# EAGLE board dumbpad (EAGLE 9.6.1)
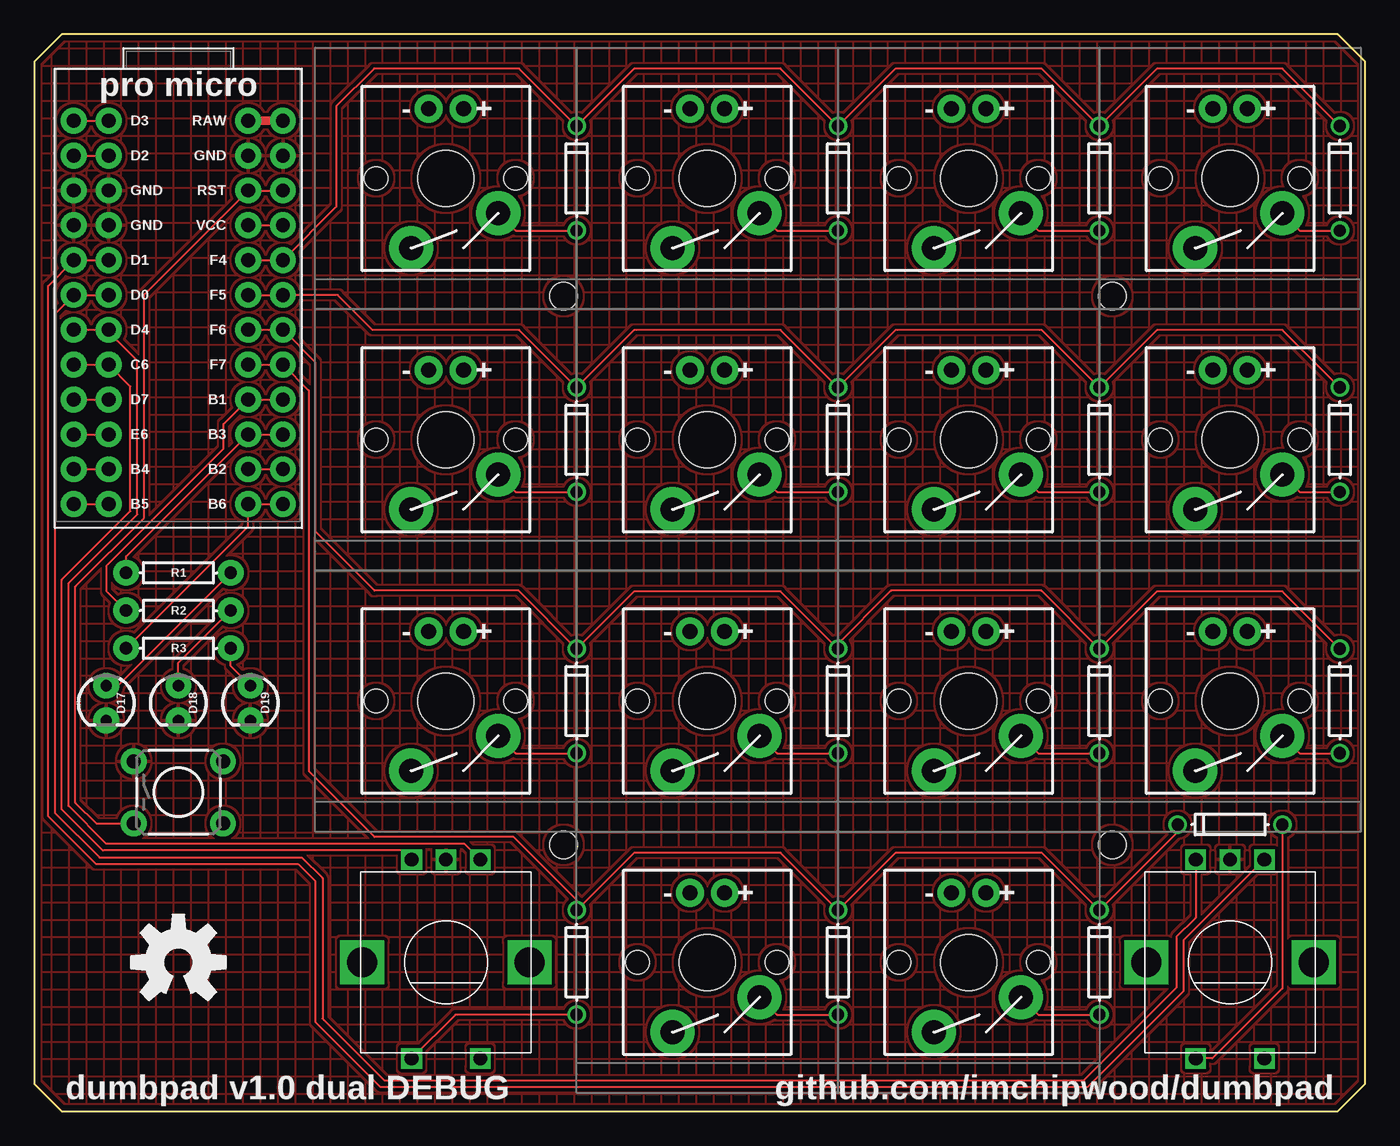
[diagram p0: board, top side]
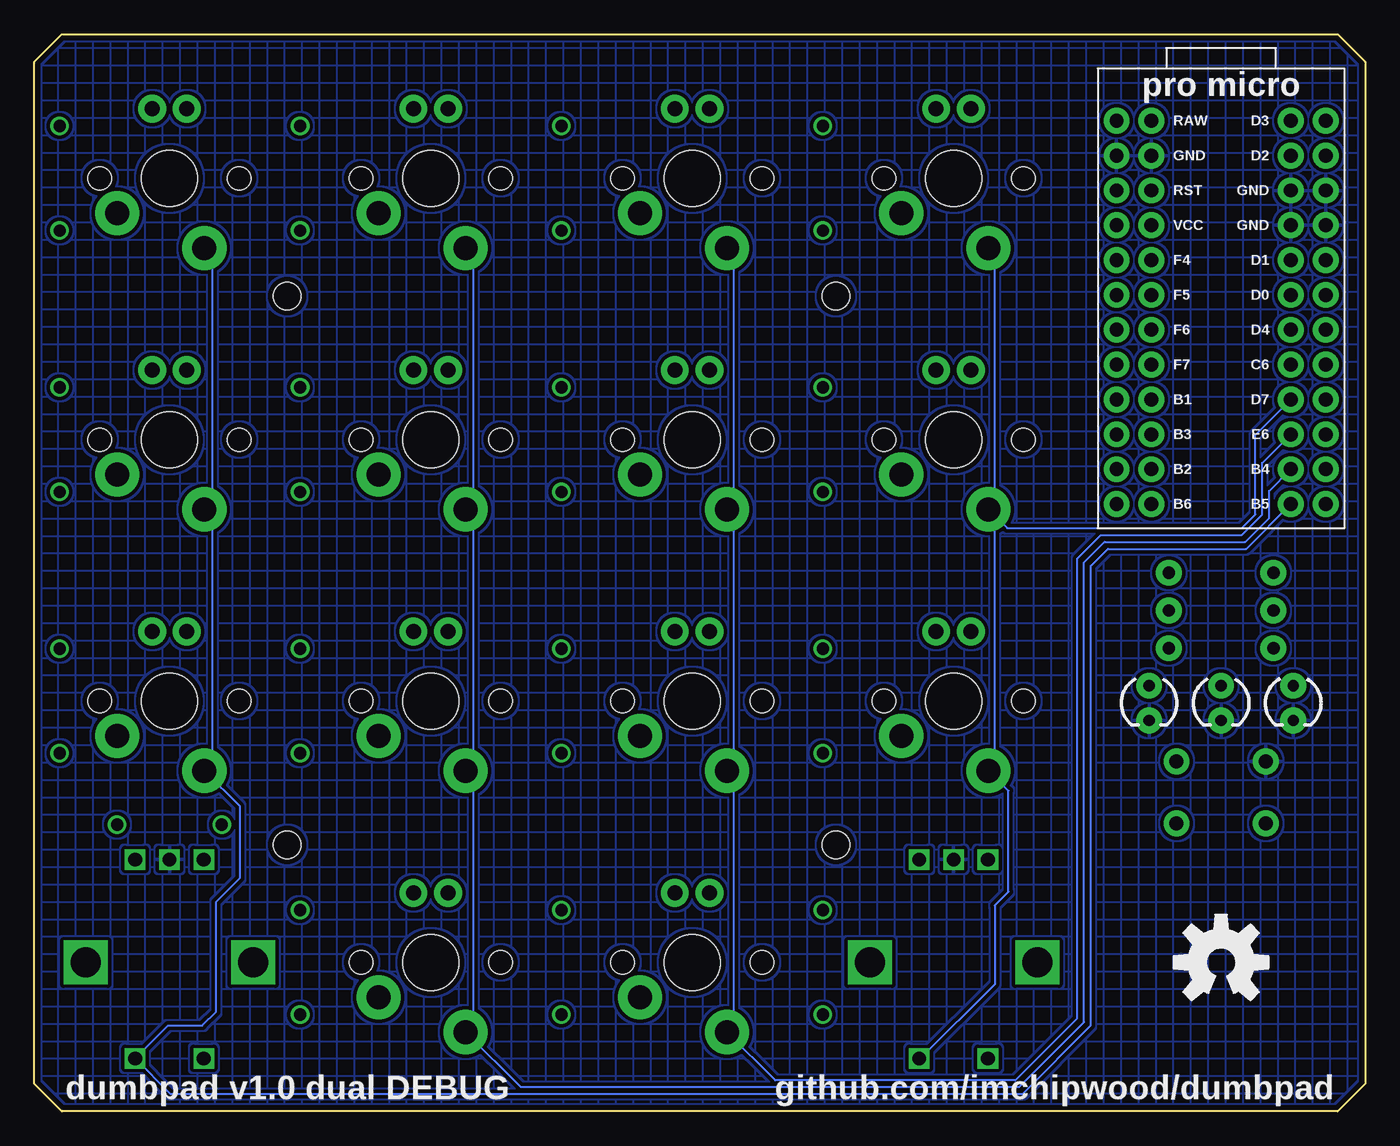
[diagram p1: board, bottom side, seen from below]

Size 97 x 78.5 mm. Coordinates in mm from the lower left corner, seen from the top.
Outline: 0,2 2,0 95,0 97,2 97,76.5 95,78.5 2,78.5 0,76.5 0,2
Copper layers (1*16): Top 0.035559375mm / dielectric 1.6mm / Bottom 0.035559375mm
Design rules "oshpark_2layer": minimum track width 6mil, minimum drill 10mil, track to track 6mil, track to pad 6mil, pad to pad 6mil, via to via 6mil, smd to smd 6mil, copper to edge 15mil, drill to drill 6mil, minimum pad ring 5mil, minimum via ring 5mil, stop-mask expansion 2.5mil, vias tented up to drill 0mil, thermal gap 10mil
Holes 2 mm at 38.58,19.43 78.58,19.43 38.58,59.42 78.58,59.42

## Footprints (pad centres in the part's own frame; a part is rotated, then mirrored left to right if it is on the bottom)
SPARKFUN_PRO_MICRO = drill 1.016 pad 1.88: 1 -7.62,12.7; 2 -7.62,10.16; 3 -7.62,7.62; 4 -7.62,5.08; 5 -7.62,2.54; 6 -7.62,0; 7 -7.62,-2.54; 8 -7.62,-5.08; 9 -7.62,-7.62; 10 -7.62,-10.16; 11 -7.62,-12.7; 12 -7.62,-15.24; 13 7.62,-15.24; 14 7.62,-12.7; 15 7.62,-10.16; 16 7.62,-7.62; 17 7.62,-5.08; 18 7.62,-2.54; 19 7.62,0; 20 7.62,2.54; 21 7.62,5.08; 22 7.62,7.62; 23 7.62,10.16; 24 7.62,12.7
DO-1N4148 = drill 0.9: A -3.81,0; C 3.81,0
LED_3MM = drill 0.813 pad 1.88: A -1.27,0; K 1.27,0
1X12_NO_SILK = drill 1.016 pad 1.88: 1 0,0; 2 2.54,0; 3 5.08,0; 4 7.62,0; 5 10.16,0; 6 12.7,0; 7 15.24,0; 8 17.78,0; 9 20.32,0; 10 22.86,0; 11 25.4,0; 12 27.94,0
AXIAL-0.3 = drill 0.9 pad 1.88: P$1 -3.81,0; P$2 3.81,0
ALPS_EC12E_SW = drill 1 square: A -2.5,-7.5; B 2.5,-7.5; C 0,-7.5; D -2.5,7; E 2.5,7 | drill 2.2 square: GND1 -6.1,0; GND2 6.1,0
CHERRY-MX-LED = drill 1.092 pad 2.032: A -1.27,-5.08; K 1.27,-5.08 | drill 1.753 pad 3.226: S1 -3.81,2.54; S2 2.54,5.08 | hole 4.089: 0,0 | hole 1.707: -5.08,0; 5.08,0
TACTILE_SWITCH_PTH_6.0MM = drill 1.016 pad 1.88: 1 -3.251,2.261; 2 3.251,2.261; 3 -3.251,-2.261; 4 3.251,-2.261

## Placement (x,y rotation side)
B1  SPARKFUN_PRO_MICRO  [SPARKFUN_PRO_MICRO]  10.5,59.5 0 top
D1  [DO-1N4148]  39.52,68 90 top
D2  [DO-1N4148]  58.58,68 90 top
D3  [DO-1N4148]  77.62,68 90 top
D4  [DO-1N4148]  95.15,68 90 top
D5  [DO-1N4148]  39.52,48.95 90 top
D6  [DO-1N4148]  58.58,48.95 90 top
D7  [DO-1N4148]  77.62,48.95 90 top
D8  [DO-1N4148]  95.15,48.95 90 top
D9  [DO-1N4148]  39.52,29.9 90 top
D10  [DO-1N4148]  58.58,29.9 90 top
D11  [DO-1N4148]  77.62,29.9 90 top
D12  [DO-1N4148]  95.15,29.9 90 top
D13  [DO-1N4148]  39.52,10.85 90 top
D14  [DO-1N4148]  58.58,10.85 90 top
D15  [DO-1N4148]  77.62,10.85 90 top
D16  [DO-1N4148]  87.15,20.9 180 top
D17  [LED_3MM]  5.25,29.75 270 top
D18  [LED_3MM]  10.5,29.75 270 top
D19  [LED_3MM]  15.75,29.75 270 top
JUMPER_LEFT  [1X12_NO_SILK]  5.42,44.26 90 top
JUMPER_RIGHT  [1X12_NO_SILK]  15.58,44.26 90 top
LOGO1  OSHW-LOGOL  [OSHW-LOGO-L]  10.5,10.85 0 bottom
LOGO2  OSHW-LOGOL  [OSHW-LOGO-L]  10.5,10.85 0 top
R1  330  [AXIAL-0.3]  10.5,39.25 180 top
R2  330  [AXIAL-0.3]  10.5,36.5 180 top
R3  330  [AXIAL-0.3]  10.5,33.75 180 top
RE0  EC12E_SW  [ALPS_EC12E_SW]  30,10.85 180 top
RE1  EC12E_SW  [ALPS_EC12E_SW]  87.15,10.85 180 top
S1  MOMENTARY-SWITCH-SPST-LED-PTH-CHERRY  [CHERRY-MX-LED]  30,68 180 top
S2  MOMENTARY-SWITCH-SPST-LED-PTH-CHERRY  [CHERRY-MX-LED]  49.05,68 180 top
S3  MOMENTARY-SWITCH-SPST-LED-PTH-CHERRY  [CHERRY-MX-LED]  68.1,68 180 top
S4  MOMENTARY-SWITCH-SPST-LED-PTH-CHERRY  [CHERRY-MX-LED]  87.15,68 180 top
S5  MOMENTARY-SWITCH-SPST-LED-PTH-CHERRY  [CHERRY-MX-LED]  30,48.95 180 top
S6  MOMENTARY-SWITCH-SPST-LED-PTH-CHERRY  [CHERRY-MX-LED]  49.05,48.95 180 top
S7  MOMENTARY-SWITCH-SPST-LED-PTH-CHERRY  [CHERRY-MX-LED]  68.1,48.95 180 top
S8  MOMENTARY-SWITCH-SPST-LED-PTH-CHERRY  [CHERRY-MX-LED]  87.15,48.95 180 top
S9  MOMENTARY-SWITCH-SPST-LED-PTH-CHERRY  [CHERRY-MX-LED]  30,29.9 180 top
S10  MOMENTARY-SWITCH-SPST-LED-PTH-CHERRY  [CHERRY-MX-LED]  49.05,29.9 180 top
S11  MOMENTARY-SWITCH-SPST-LED-PTH-CHERRY  [CHERRY-MX-LED]  68.1,29.9 180 top
S12  MOMENTARY-SWITCH-SPST-LED-PTH-CHERRY  [CHERRY-MX-LED]  87.15,29.9 180 top
S14  MOMENTARY-SWITCH-SPST-LED-PTH-CHERRY  [CHERRY-MX-LED]  49.05,10.85 180 top
S15  MOMENTARY-SWITCH-SPST-LED-PTH-CHERRY  [CHERRY-MX-LED]  68.1,10.85 180 top
S17  MOMENTARY-SWITCH-SPST-PTH-6.0MM  [TACTILE_SWITCH_PTH_6.0MM]  10.5,23.25 0 top

## Library data of the parts
B1 = SparkFun-Boards
D1-D16 = adafruit
D17-D19 = SparkFun-LED; PROD_ID: DIO-08794
JUMPER_LEFT JUMPER_RIGHT = SparkFun-Connectors
LOGO1 LOGO2 = SparkFun-Aesthetics
R1-R3 = SparkFun-Resistors; PROD_ID: RES-8371
RE0 RE1 = switch-alps; MPN: EC12E2424407; OC_FARNELL: 1520813; OC_NEWARK: 74M1068
S1-S12 S14 S15 = SparkFun-Switches; SF_ID: COM-13834
S17 = SparkFun-Switches; PROD_ID: SWCH-08441; SF_SKU: COM-00097

## Nets
COL0: B1.9 JUMPER_LEFT.4 RE0.D S1.S2 S5.S2 S9.S2
COL1: B1.10 JUMPER_LEFT.3 S2.S2 S6.S2 S10.S2 S14.S2
COL2: B1.11 JUMPER_LEFT.2 S3.S2 S7.S2 S11.S2 S15.S2
COL3: B1.12 JUMPER_LEFT.1 RE1.D S4.S2 S8.S2 S12.S2
ENCODER0_L0: B1.8 JUMPER_LEFT.5 RE0.B
ENCODER0_L1: B1.7 JUMPER_LEFT.6 RE0.A
ENCODER1_L0: B1.5 JUMPER_LEFT.8 RE1.A
ENCODER1_L1: B1.6 JUMPER_LEFT.7 RE1.B
GND: B1.3 B1.4 B1.23 D17.K D18.K D19.K JUMPER_LEFT.9 JUMPER_LEFT.10 JUMPER_RIGHT.11 RE0.C RE1.C S17.1
LED0: B1.15 JUMPER_RIGHT.3 R1.P$2
LED1: B1.16 JUMPER_RIGHT.4 R2.P$2
LED2: B1.13 JUMPER_RIGHT.1 R3.P$2
N$1: D4.A S4.S1
N$2: D3.A S3.S1
N$3: D2.A S2.S1
N$4: D1.A S1.S1
N$5: D17.A R1.P$1
N$6: D8.A S8.S1
N$7: D7.A S7.S1
N$8: D6.A S6.S1
N$9: D5.A S5.S1
N$10: D18.A R2.P$1
N$11: D16.A RE1.E
N$12: D15.A S15.S1
N$13: D14.A S14.S1
N$14: D13.A RE0.E
N$15: D19.A R3.P$1
N$16: D12.A S12.S1
N$17: D11.A S11.S1
N$18: D10.A S10.S1
N$19: D9.A S9.S1
NC/MOSI/B2: B1.14 JUMPER_RIGHT.2
NC/RX/D2: B1.2 JUMPER_LEFT.11
NC/TX/D3: B1.1 JUMPER_LEFT.12
RAW: B1.24 JUMPER_RIGHT.12
RESET: B1.22 JUMPER_RIGHT.10 S17.3
ROW0: B1.20 D1.C D2.C D3.C D4.C JUMPER_RIGHT.8
ROW1: B1.19 D5.C D6.C D7.C D8.C JUMPER_RIGHT.7
ROW2: B1.18 D9.C D10.C D11.C D12.C JUMPER_RIGHT.6
ROW3: B1.17 D13.C D14.C D15.C D16.C JUMPER_RIGHT.5
VCC: B1.21 JUMPER_RIGHT.9

## Tracks (layer width: path | path; a pad name or v marks a point on that pad's centre or on a via)
COL0
  Top 0.152: B1.9 JUMPER_LEFT.4
  Bottom 0.152: S1.S2 27,62.46 27,44.33 S5.S2 27,43.41 | 27,43.41 27,25.28 S9.S2 26,23.36 26,16 27,15 27,9.25 32.4,3.85 RE0.D | 27,43.41 26.09,42.5 9,42.5 8,43.5 8,49.3 JUMPER_LEFT.4
COL1
  Top 0.152: B1.10 JUMPER_LEFT.3
  Bottom 0.152: S2.S2 46,62.41 46,44.38 S6.S2 46,43.36 46,25.33 S10.S2 46,24.31 46,6.28 S14.S2 42.99,2.25 25.5,2.25 21,6.75 21,40.25 19.25,42 9,42 7.5,43.5 7.5,47.26 JUMPER_LEFT.3
COL2
  Top 0.152: B1.11 JUMPER_LEFT.2
  Bottom 0.152: S3.S2 65,62.36 65,44.43 S7.S2 65,43.31 65,25.38 S11.S2 65,24.26 65,6.33 S15.S2 61.54,1.75 25.25,1.75 20.5,6.5 20.5,40 19,41.5 8.75,41.5 7,43.25 7,45.22 JUMPER_LEFT.2
COL3
  Top 0.152: B1.12 JUMPER_LEFT.1
  Bottom 0.152: S4.S2 84,62.31 84,44.48 S8.S2 84,43.26 84,25.43 S12.S2 82,22.21 82,17 83.75,15.25 83.75,7.25 84.75,6.25 87.25,6.25 RE1.D 87.05,1.25 25,1.25 20,6.25 20,39.75 18.75,41 8.68,41 JUMPER_LEFT.1
ENCODER0_L0
  Top 0.152: RE0.B 26.85,19 5,19 2,22 2,38.75 7,43.75 7,52.84 JUMPER_LEFT.5 B1.8
ENCODER0_L1
  Top 0.152: RE0.A 31.35,19.5 5.25,19.5 2.5,22.25 2.5,38.5 7.5,43.5 7.5,54.71 5.25,56.96 | B1.7 5.25,56.96 | 5.25,56.96 JUMPER_LEFT.6
ENCODER1_L0
  Top 0.152: RE1.A 83.75,12.45 83.75,8.75 76.75,1.75 25.25,1.75 20.5,6.5 20.5,16.75 19.25,18 4.5,18 1,21.5 1,60.16 B1.5 JUMPER_LEFT.8
ENCODER1_L1
  Top 0.152: RE1.B 84.65,14.1 83.25,12.7 83.25,9 76.5,2.25 25.5,2.25 21,6.75 21,17 19.5,18.5 4.75,18.5 1.5,21.75 1.5,58.12 B1.6 JUMPER_LEFT.7
GND
  pour Top (isolate 0.254, hatched): 0,2 2,0 95,0 97,2 97,76.5 95,78.5 2,78.5 0,76.5
  pour Bottom (isolate 0.254, hatched): 0,2 2,0 95,0 97,2 97,76.5 95,78.5 2,78.5 0,76.5
LED0
  Top 0.152: B1.15 JUMPER_RIGHT.3 6.69,40.45 R1.P$2
LED1
  Top 0.152: B1.16 JUMPER_RIGHT.4 13.8,50.1 13.8,48.3 5.25,39.75 5.25,37.94 R2.P$2
LED2
  Top 0.152: B1.13 JUMPER_RIGHT.1 15.58,42.64 R3.P$2
N$1
  Top 0.152: S4.S1 92.23,64.19 D4.A
N$2
  Top 0.152: S3.S1 73.18,64.19 D3.A
N$3
  Top 0.152: S2.S1 54.13,64.19 D2.A
N$4
  Top 0.152: S1.S1 35.08,64.19 D1.A
N$5
  Top 0.152: D17.A 6.08,31.02 R1.P$1
N$6
  Top 0.152: S8.S1 92.23,45.14 D8.A
N$7
  Top 0.152: S7.S1 73.18,45.14 D7.A
N$8
  Top 0.152: S6.S1 54.13,45.14 D6.A
N$9
  Top 0.152: S5.S1 35.08,45.14 D5.A
N$10
  Top 0.152: D18.A 10.5,32.69 R2.P$1
N$11
  Top 0.152: D16.A 90.96,8.96 85.85,3.85 RE1.E
N$12
  Top 0.152: S15.S1 73.18,7.04 D15.A
N$13
  Top 0.152: S14.S1 54.13,7.04 D14.A
N$14
  Top 0.152: D13.A 30.69,7.04 RE0.E
N$15
  Top 0.152: D19.A 14.31,32.46 R3.P$1
N$16
  Top 0.152: S12.S1 92.23,26.09 D12.A
N$17
  Top 0.152: S11.S1 73.18,26.09 D11.A
N$18
  Top 0.152: S10.S1 54.13,26.09 D10.A
N$19
  Top 0.152: S9.S1 35.08,26.09 D9.A
NC/MOSI/B2
  Top 0.152: JUMPER_RIGHT.2 B1.14
NC/RX/D2
  Top 0.152: B1.2 JUMPER_LEFT.11
NC/TX/D3
  Top 0.152: B1.1 JUMPER_LEFT.12
RAW
  Top 0.61: B1.24 JUMPER_RIGHT.12
RESET
  Top 0.152: S17.3 4.5,20.99 3,22.49 3,38.25 8,43.25 8,59.54 JUMPER_RIGHT.10 B1.22
ROW0
  Top 0.152: D4.C 90.96,76 81.81,76 D3.C 73.44,76 62.77,76 D2.C 54.38,76 43.72,76 D1.C 35.34,76 24.75,76 22,73.25 22,65.92 B1.20 JUMPER_RIGHT.8
ROW1
  Top 0.152: D8.C 90.96,56.95 81.81,56.95 D7.C 73.44,56.95 62.77,56.95 D6.C 54.38,56.95 43.72,56.95 D5.C 35.34,56.95 24.67,56.95 22.12,59.5 B1.19 JUMPER_RIGHT.7
ROW2
  Top 0.152: D10.C 58.39,33.89 | 58.39,33.89 54.38,37.9 43.72,37.9 D9.C 35.28,37.95 24.8,37.95 20.5,42.25 20.5,54.58 B1.18 JUMPER_RIGHT.6 | 58.39,33.89 62.45,37.95 73.39,37.95 D11.C 81.81,37.9 90.96,37.9 D12.C
ROW3
  Top 0.152: D16.C 83.34,20.38 D15.C 73.44,18.85 62.77,18.85 D14.C 54.38,18.85 43.72,18.85 D13.C 39.52,15.41 34.94,20 24.8,20 20,24.8 20,52.54 B1.17 JUMPER_RIGHT.5
VCC
  Top 0.152: JUMPER_RIGHT.9 B1.21

## Text on the board
tPlace: pro micro | D3 | RAW | D2 | GND | GND | RST | GND | VCC | D1 | F4 | D0 | F5 | D4 | F6 | C6 | F7 | D7 | B1 | E6 | B3 | B4 | B2 | B5 | B6
bPlace: pro micro | D3 | RAW | D2 | GND | GND | RST | GND | VCC | D1 | F4 | D0 | F5 | D4 | F6 | C6 | F7 | D7 | B1 | E6 | B3 | B4 | B2 | B5 | B6
tNames: dumbpad v1.0 dual DEBUG | github.com/imchipwood/dumbpad
bNames: github.com/imchipwood/dumbpad | dumbpad v1.0 dual DEBUG